# Allegro board DIGITAL_CONVERTOR.brd
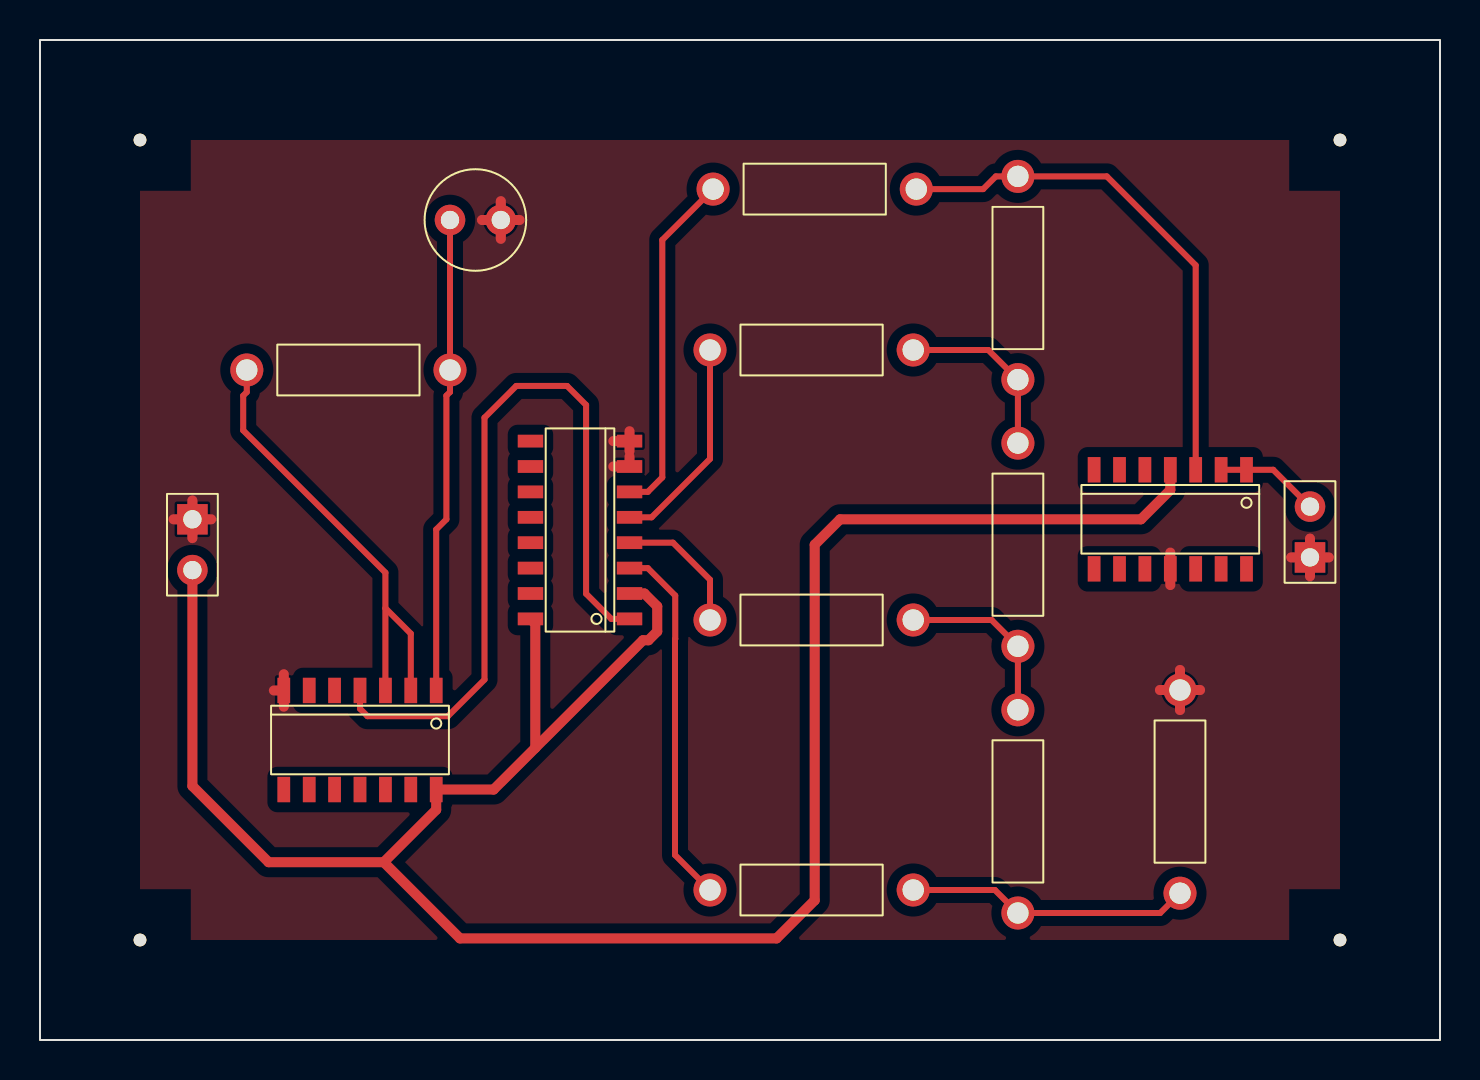
[diagram p0: board, top side]
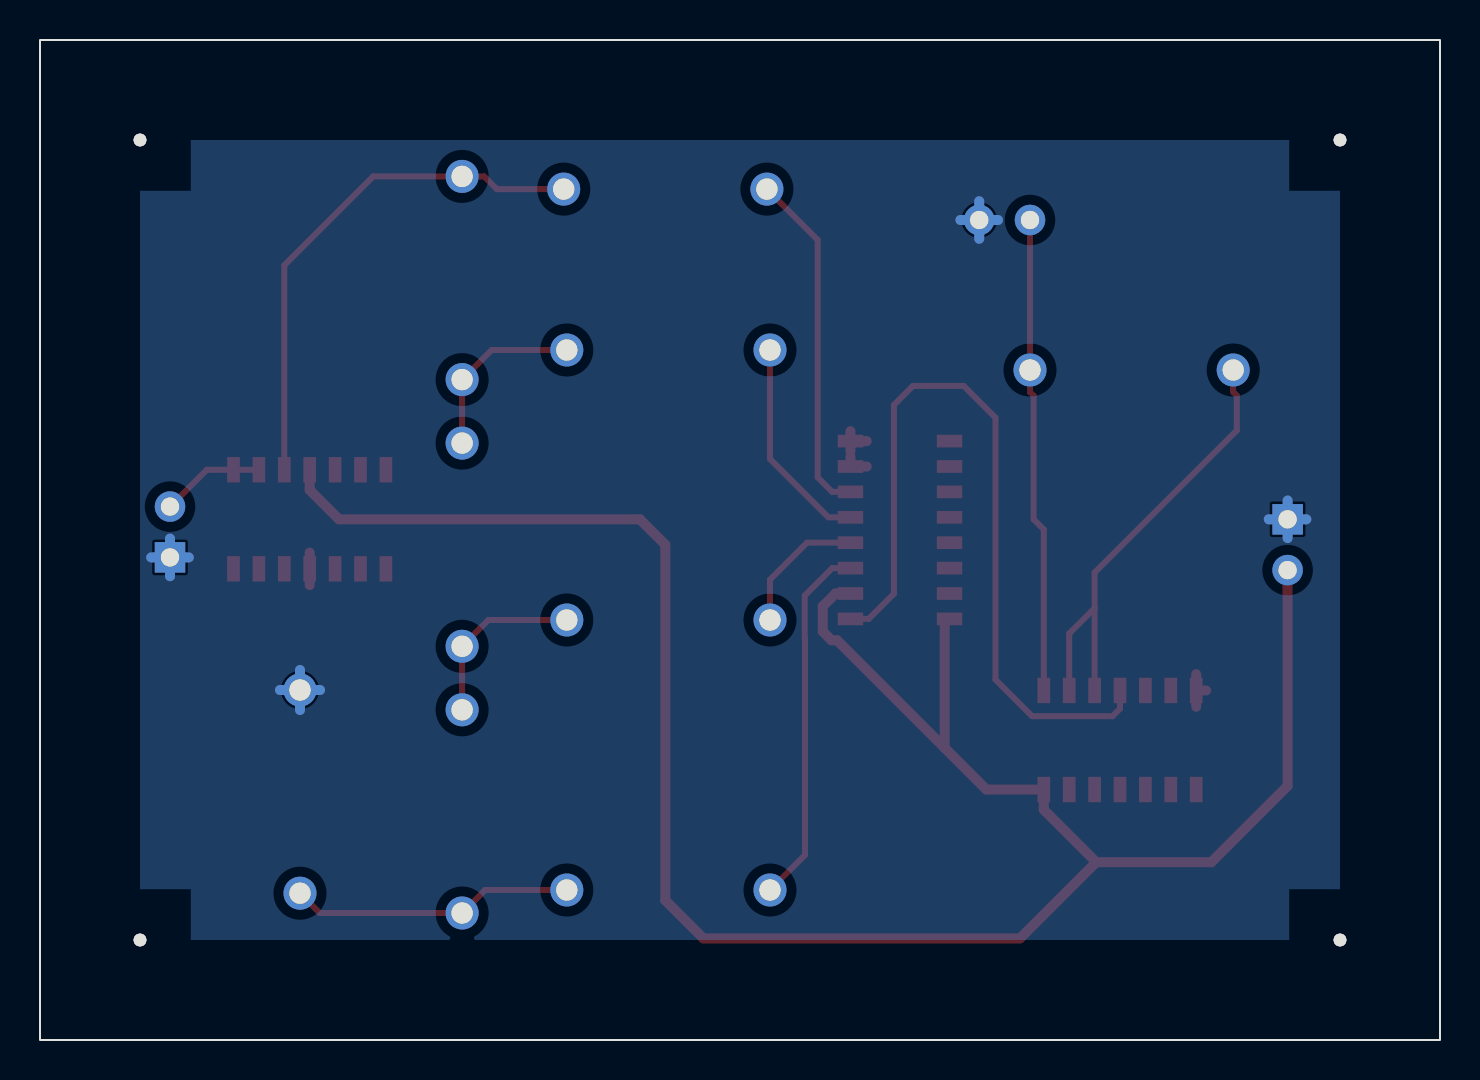
[diagram p1: board, bottom side, seen from below]

Outline 70 x 50 mm; copper layers: TOP, BOTTOM. Coordinates in mm from the lower left corner of the outline.
Outline path: rectangle 0,0 70,50

## Design rules (mm)
constraint set DEFAULT: min track width 0.3, pair gap 0.5
nets with their own width: min track width 0.5; nets VCC

## Placement (name value [footprint] x y rotation side)
C1  10uF  [CAP196]  20.5 41 270 top
J1  CON2  [JUMPER2]  63.5 24.13 90 top
J2  CON2  [JUMPER2]  7.62 26.04 270 top
NOREF  -  []  5 5 90 top
NOREF#2  -  []  0 50 0 top
NOREF#3  -  []  5 5 0 top
NOREF#4  -  []  70 0 90 top
NOREF#5  -  [unnamed#2]  5 5 0 top
NOREF#6  -  [unnamed#2]  5 45 0 top
NOREF#7  -  []  2 2 0 top
NOREF#8  -  []  65 5 90 top
NOREF#9  -  [unnamed#2]  65 45 0 top
NOREF#10  -  []  5 45 0 top
NOREF#11  -  []  0 0 0 top
NOREF#12  -  []  0 0 90 top
NOREF#13  -  [unnamed#2]  65 5 0 top
R1  50K  [RES400]  20.5 33.5 90 top
R2  20K  [RES400]  33.66 42.55 270 top
R3  10K  [RES400]  48.9 33.02 0 top
R4  20K  [RES400]  33.5 34.5 270 top
R5  10K  [RES400]  48.9 19.68 0 top
R6  20K  [RES400]  33.5 21 270 top
R7  10K  [RES400]  48.9 6.35 0 top
R8  20K  [RES400]  33.5 7.5 270 top
R9  20K  [RES400]  57 17.5 180 top
U1  7414  [SOIC14]  16 15 270 top
U2  4520  [SOIC16]  27 25.5 180 top
U3  MCP6024  [SOIC14]  56.52 26.04 270 top

## Library data of the parts
C1 = C: Tolerance: ***; User Part Number: ***
J1 J2 = CON2: User Part Number: ***
R1-R9 = R: Tolerance: ***; User Part Number: ***
U1 = 7414: Tolerance: ***; User Part Number: ***
U2 = 4520_0: Tolerance: ***; User Part Number: ***
U3 = LM324_0: Tolerance: ***; User Part Number: ***

## Footprints (pads in the part's own frame, mm; a bottom-side part is the same pattern mirrored in y, then rotated)
CAP196
  round 1.524 hole 0.914: 1(0,0) 2(0,2.54)
JUMPER2
  rect 1.524x1.524 hole 0.914: 1(0,0)
  round 1.524 hole 0.914: 2(2.54,0)
RES400
  round 1.651 hole 1.067: 1(0,0) 2(0,10.16)
SOIC14
  rect 1.27x0.635 smd: 1(-2.477,3.81) 2(-2.477,2.54) 3(-2.477,1.27) 4(-2.477,0) 5(-2.477,-1.27) 6(-2.477,-2.54) 7(-2.477,-3.81) 8(2.477,-3.81) 9(2.477,-2.54) 10(2.477,-1.27) 11(2.477,0) 12(2.477,1.27) 13(2.477,2.54) 14(2.477,3.81)
SOIC16
  rect 1.27x0.635 smd: 1(-2.477,4.445) 2(-2.477,3.175) 3(-2.477,1.905) 4(-2.477,0.635) 5(-2.477,-0.635) 6(-2.477,-1.905) 7(-2.477,-3.175) 8(-2.477,-4.445) 9(2.477,-4.445) 10(2.477,-3.175) 11(2.477,-1.905) 12(2.477,-0.635) 13(2.477,0.635) 14(2.477,1.905) 15(2.477,3.175) 16(2.477,4.445)
unnamed#2
  round 0.635 hole 3.175 unplated: (0,0)

## Nets
GND: C1.2 J1.1 J2.1 R9.1 U1.7 U2.7 U2.8 U3.11
VCC: J2.2 U1.14 U2.2 U2.16 U3.4
N00513: C1.1 R1.1 U1.1
N00520: R1.2 U1.2 U1.3
N00591: R2.1 U2.6
N00603: R4.1 U2.5
N00615: R6.1 U2.4
N00627: R8.1 U2.3
N00639: R2.2 R3.2 U3.3
N00643: R3.1 R4.2 R5.2
N00651: R7.1 R8.2 R9.2
N00665: R5.1 R6.2 R7.2
N00720: J1.2 U3.1 U3.2
N000811: U1.4 U2.1

Pads without a net: U1 5 6 8 9 10 11 12 13; U2 9 10 11 12 13 14 15; U3 5 6 7 8 9 10 12 13 14

## Routing (per net, layer and track width the routed paths; a pad name or vN(x,y) marks a point on that pad's centre or on a via; arc(x,y) is an arc through that point)
GND: length 37.4
  TOP w0.5: 56.52,24.37 U3.11 56.52,22.75 ; 57,16.5 R9.1 ; R9.1 58,17.5 ; R9.1 56,17.5 ; R9.1 57,18.5 ; C1.2 23.04,41.94 ; C1.2 23.04,40.06 ; C1.2 22.1,41 ; C1.2 23.98,41 ; J1.1 63.5,25.07 ; J1.1 63.5,23.19 ; J1.1 64.44,24.13 ; J1.1 62.56,24.13 ; 12.19,16.66 U1.7 ; U1.7 12.19,18.29 ; U1.7 11.69,17.48 ; 28.66,28.68 U2.7 29.48,29.17 ; 7.62,25.09 J2.1 ; J2.1 7.62,26.98 ; J2.1 6.68,26.04 ; J2.1 8.56,26.04 ; 28.66,29.95 U2.8 ; U2.8 29.48,30.44 ; U2.8 29.48,29.45
  BOTTOM w0.5: J2.1 8.56,26.04 ; J2.1 7.62,25.09 ; J2.1 6.68,26.04 ; J2.1 7.62,26.98 ; 22.1,41 C1.2 ; C1.2 23.04,40.06 ; C1.2 23.98,41 ; C1.2 23.04,41.94 ; 63.5,23.19 J1.1 ; J1.1 63.5,25.07 ; J1.1 64.44,24.13 ; J1.1 62.56,24.13 ; 56,17.5 R9.1 ; R9.1 57,18.5 ; R9.1 58,17.5 ; R9.1 57,16.5
VCC: length 112.1
  TOP w0.5: 17.19,8.89 21,5.08 36.83,5.08 38.73,6.99 38.73,24.77 40.01,26.04 55.05,26.04 56.52,27.5 U3.4 ; 17.19,8.89 19.81,11.51 U1.14 22.68,12.52 24.77,14.61 ; 17.19,8.89 11.43,8.89 7.62,12.7 J2.2 ; 24.77,14.61 30.15,19.99 30.42,19.99 30.86,20.43 30.86,21.68 30.22,22.32 U2.2 ; 24.77,14.61 24.77,20.81 U2.16
N00513: length 23.8
  TOP w0.3: C1.1 R1.1 20.5,32.4 20.32,32.22 20.32,26.04 19.81,25.52 U1.1
N00520: length 23.7
  TOP w0.3: 17.27,21.59 U1.3 ; 17.27,21.59 17.27,23.37 10.16,30.48 10.16,32.22 10.34,32.4 R1.2 ; 17.27,21.59 18.54,20.32 U1.2
N00591: length 17.4
  TOP w0.3: R2.1 31.11,40.01 31.11,28.13 30.39,27.41 U2.6
N00603: length 10.7
  TOP w0.3: U2.5 30.58,26.14 33.5,29.05 R4.1
N00615: length 6.8
  TOP w0.3: R6.1 33.5,23.02 31.65,24.86 U2.4
N00627: length 18.3
  TOP w0.3: U2.3 30.39,23.59 31.76,22.22 31.76,20.05 31.75,20.04 31.75,9.25 R8.1
N00639: length 26.3
  TOP w0.3: R2.2 47.16,42.55 47.79,43.18 R3.2 53.34,43.18 57.78,38.73 57.78,28.51
N00643: length 9
  TOP w0.3: R4.2 47.41,34.5 R3.1 R5.2
N00651: length 14.2
  TOP w0.3: R8.2 47.74,7.5 R7.1 56.01,6.35 R9.2
N00665: length 9
  TOP w0.3: R7.2 R5.1 47.58,21 R6.2
N00720: length 5.2
  TOP w0.3: U3.2 U3.1 61.66,28.51 J1.2
N000811: length 39.4
  TOP w0.3: U2.1 28.56,21.05 27.3,22.31 27.3,31.75 26.35,32.7 23.81,32.7 22.23,31.11 22.23,18.02 20.4,16.19 16.37,16.19 16,16.56 U1.4

## Copper pours and planes (outline as drawn; the poured copper is in the pictures)
GND on TOP: 5,5 5,45 65,45 65,5 ; 1 cut-out
GND on BOTTOM: 5,5 5,45 65,45 65,5

## Text on the board
COMPVAL_TYPE_TOP: FIGURE | FINISHED_SIZE | 0.9144 | 1.0668 | 3.175 | DRILL CHART: TOP to BOTTOM | ALL UNITS ARE IN MILLIMETERS | PLATED | NON-PLATED | QTY | 6 | 18 | 4
